# EAGLE board MOD-Y_V02 (EAGLE 9.6.2)
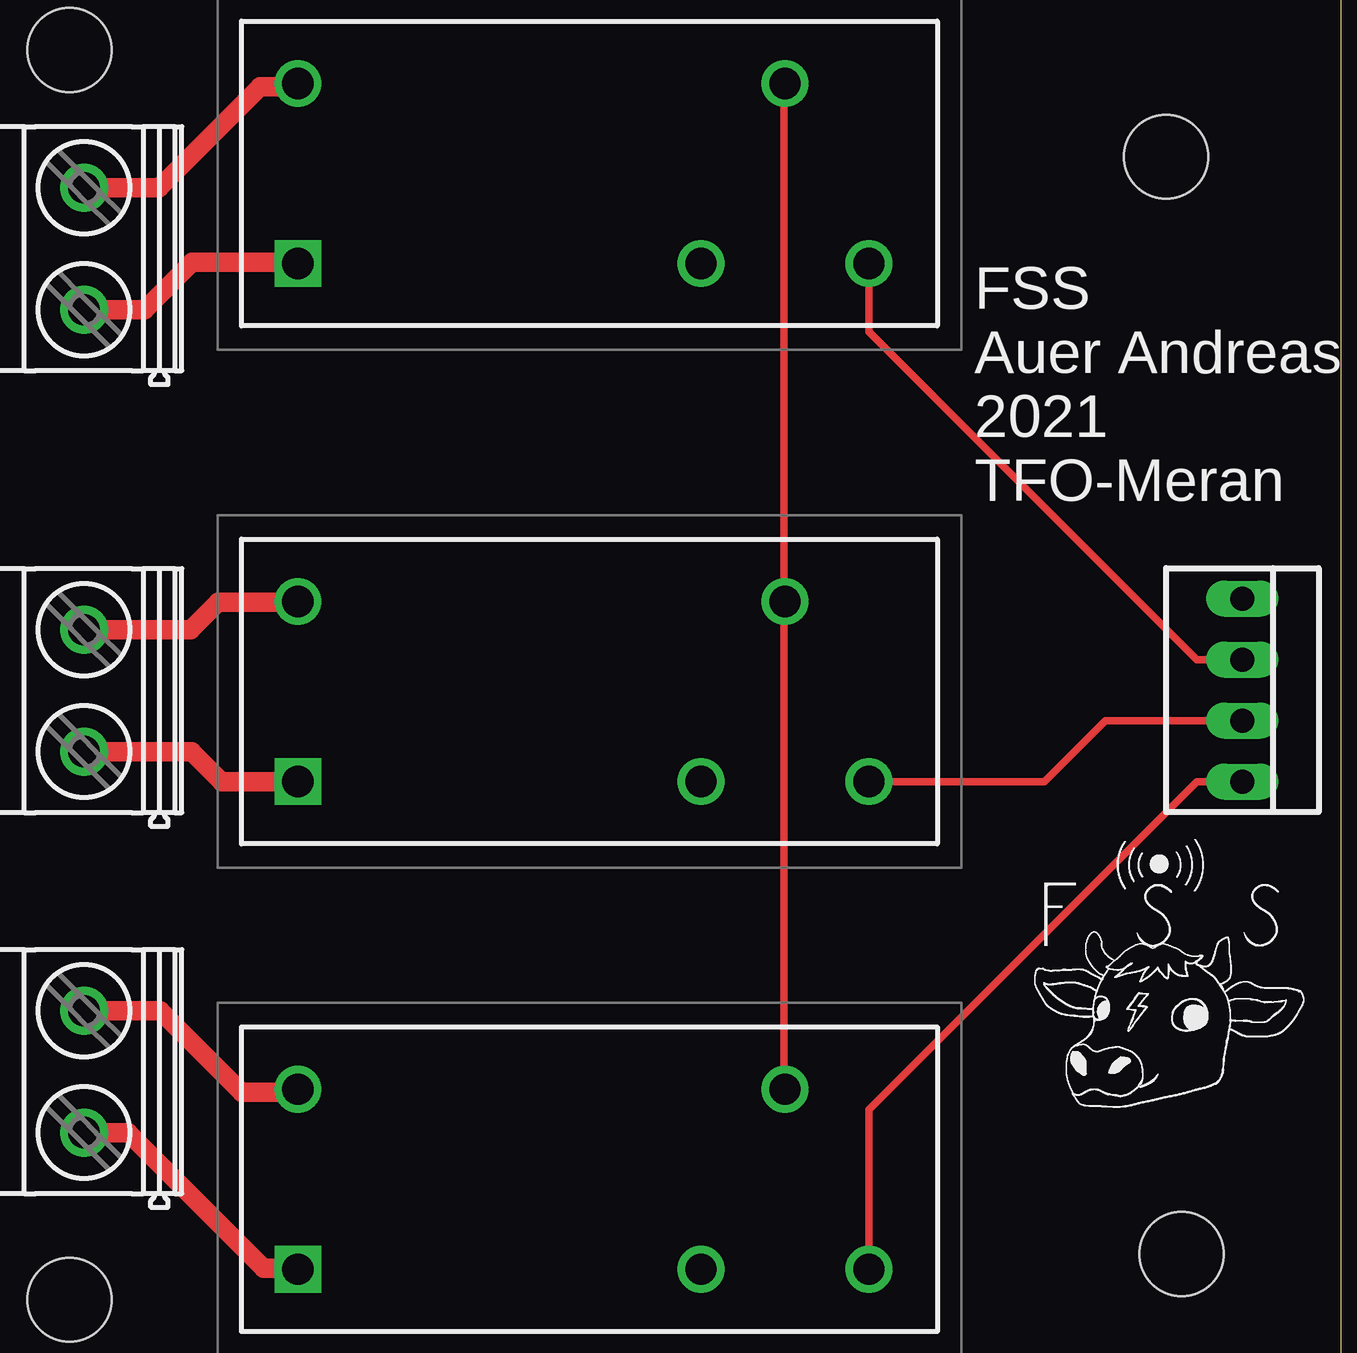
[diagram p0: board, top side]
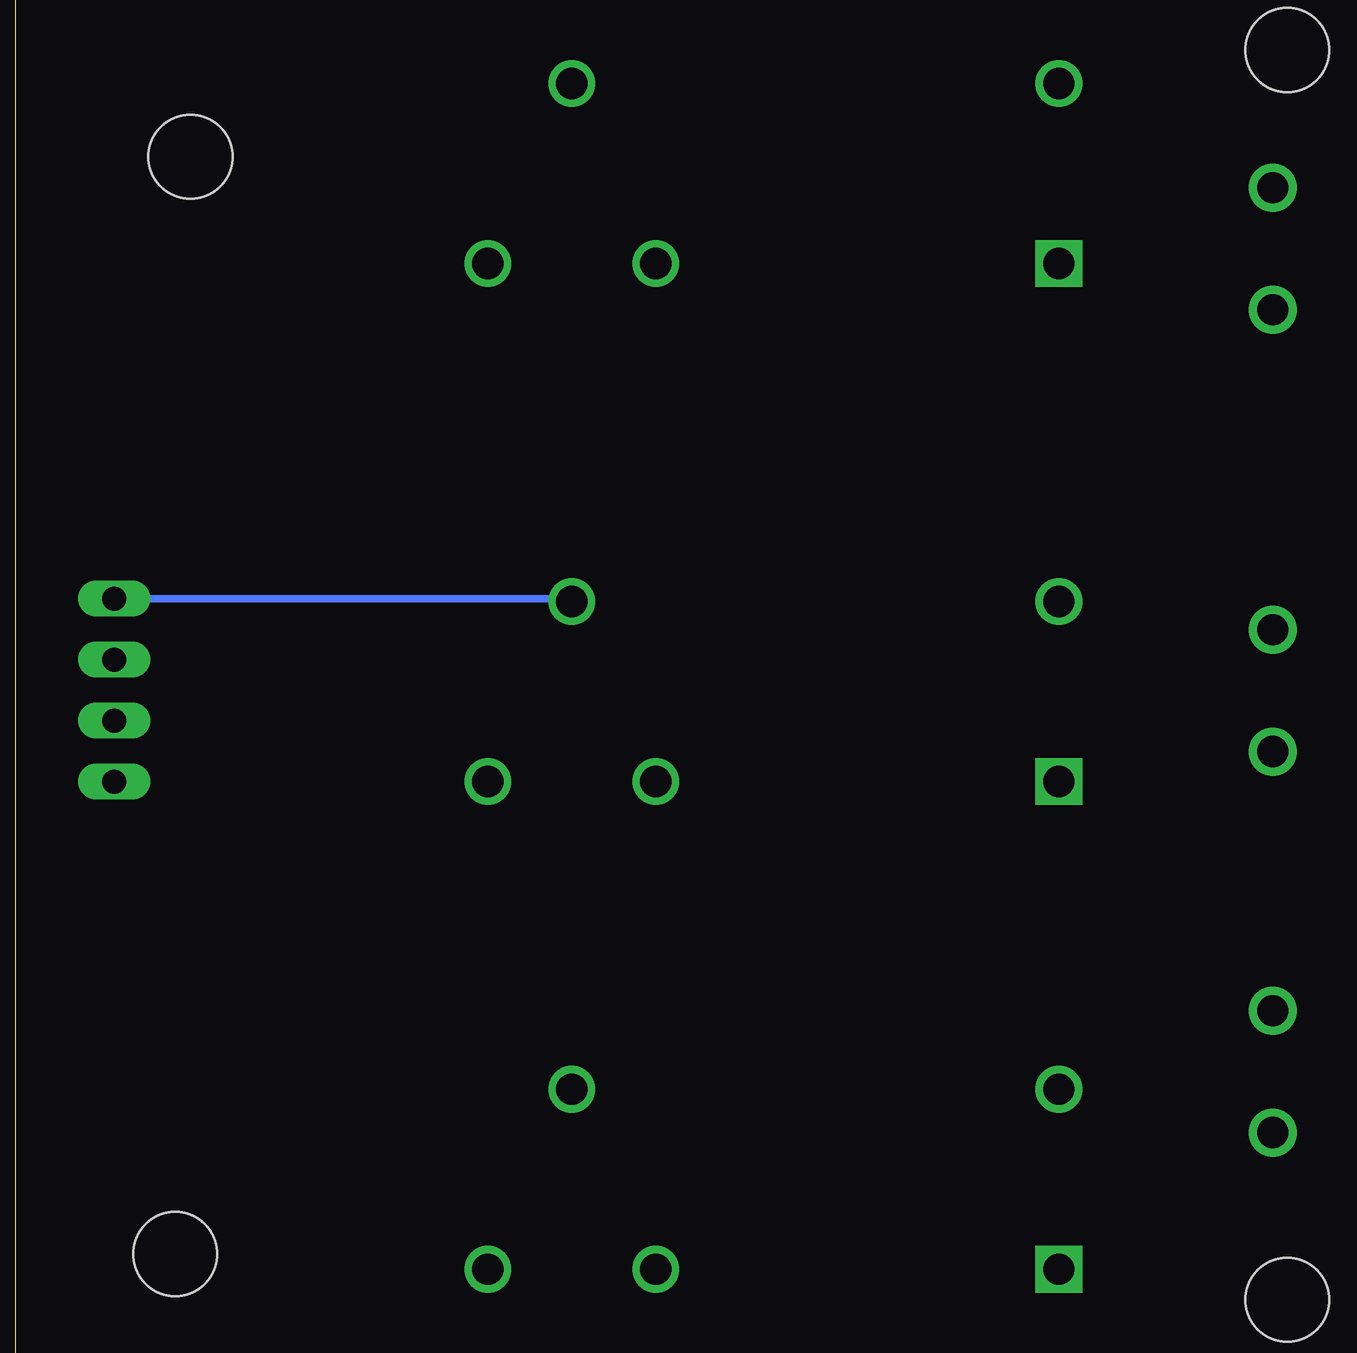
[diagram p1: board, bottom side, seen from below]

No outline drawn. Coordinates in mm, seen from the top.
Copper layers (1*16): Top 0.035mm / dielectric 1.5mm / Bottom 0.035mm
Design rules "default": minimum track width 6mil, minimum drill 0.35mm, track to track 6mil, track to pad 6mil, pad to pad 6mil, via to via 6mil, smd to smd 6mil, copper to edge 40mil, drill to drill 6mil, minimum pad ring 10mil, minimum via ring 8mil, stop-mask expansion 4mil, vias tented up to drill 0mil, thermal gap 10mil
Holes 3.5 mm at 5.71,57.15 5.71,5.08 52.07,6.99 51.44,52.7
Milling: 4 lines

## Footprints (pad centres in the part's own frame; a part is rotated, then mirrored left to right if it is on the bottom)
RT14730 = drill 1.3 pad 1.95: 11 20.3,7.5; 12 16.8,0; 14 23.8,0; A2 0,7.5 | drill 1.3 pad 1.95 square: A1 0,0
22-23-2041 = drill 1 long: 1 -3.81,0; 2 -1.27,0; 3 1.27,0; 4 3.81,0
MKDSN1,5/2-5,08 = drill 1.3 pad 2: 1 -2.561,0.025; 2 2.519,0.025

## Placement (x,y rotation side)
K7  RT14730  [RT14730]  15.24,6.35 0 top
K8  RT14730  [RT14730]  15.24,48.26 0 top
K9  RT14730  [RT14730]  15.24,26.67 0 top
X1  22-23-2041  [22-23-2041]  54.61,30.48 270 top
X5  MKDSN1,5/2-5,08  [MKDSN1,5/2-5,08]  6.35,14.61 90 top
X6  MKDSN1,5/2-5,08  [MKDSN1,5/2-5,08]  6.35,48.9 90 top
X7  MKDSN1,5/2-5,08  [MKDSN1,5/2-5,08]  6.35,30.48 90 top

## Library data of the parts
K7-K9 = rt14730; DESCRIPTION: Power PCB Relay RT1; HEIGHT: 15.7mm; MANUFACTURER_NAME: DEUTSCH - TE CONNECTIVITY; MANUFACTURER_PART_NUMBER: rt14730
X1 = con-molex; MF: MOLEX; MPN: 22-23-2041; OC_FARNELL: 1462920; OC_NEWARK: 38C0355
X5-X7 = con-phoenix-508

## Nets
GND: K7.11 K8.11 K9.11 X1.1
N$1: K7.A2 X5.2
N$2: K9.A2 X7.2
N$3: K8.A2 X6.2
N$14: K7.A1 X5.1
N$15: K8.A1 X6.1
N$16: K9.A1 X7.1
NO1: K8.14 X1.2
NO2: K9.14 X1.3
NO3: K7.14 X1.4

## Tracks (layer width: path | path; a pad name or v marks a point on that pad's centre or on a via)
GND
  Top 0.305: K7.11 35.51,13.87 35.51,34.14 K9.11 35.51,34.29 35.51,55.63 K8.11
  Bottom 0.305: X1.1 35.66,34.29 K9.11
N$1
  Top 0.305: 15.24,13.72 K7.A2
  Top 0.813: 15.24,13.72 12.91,13.72 9.5,17.12 X5.2
N$2
  Top 0.305: 15.24,34.14 K9.A2
  Top 0.813: 15.24,34.14 11.91,34.14 10.77,33 X7.2
N$3
  Top 0.305: 15.24,55.63 K8.A2
  Top 0.813: 15.24,55.63 13.66,55.63 9.45,51.41 X6.2
N$14
  Top 0.305: 15.24,6.4 K7.A1
  Top 0.813: 15.24,6.4 13.82,6.4 8.18,12.04 X5.1
N$15
  Top 0.305: 15.24,48.31 K8.A1
  Top 0.813: 15.24,48.31 10.84,48.31 8.87,46.33 X6.1
N$16
  Top 0.813: K9.A1 12.06,26.67 10.82,27.92 X7.1
NO1
  Top 0.305: K8.14 39.04,45.41 52.7,31.75 X1.2
NO2
  Top 0.152: 54.56,29.11 X1.3 | 39.17,26.67 K9.14
  Top 0.305: X1.3 48.9,29.21 46.35,26.67 K9.14
NO3
  Top 0.305: K7.14 39.04,13.01 52.7,26.67 X1.4

## Text on the board
tPlace: FSS / Auer Andreas / 2021 / TFO-Meran
bPlace: C:/Users/Kneidl/OneDrive - Bildungsdirektion/Andreas/Oberschule/5. Oberschule 202122/Maturaprjoct/drawing/Logo/FSSLOGOCut_BW.bmp